# Altium PCB PCBkey.PcbDoc
Units mil, origin at the board's own origin, x right, y up, seen from the top; angles counter-clockwise.
Board outline 3925 x 2365 mil, 2 copper layers (Top Layer, Bottom Layer); 83 components, 73 nets, 311 pads, 107 vias.
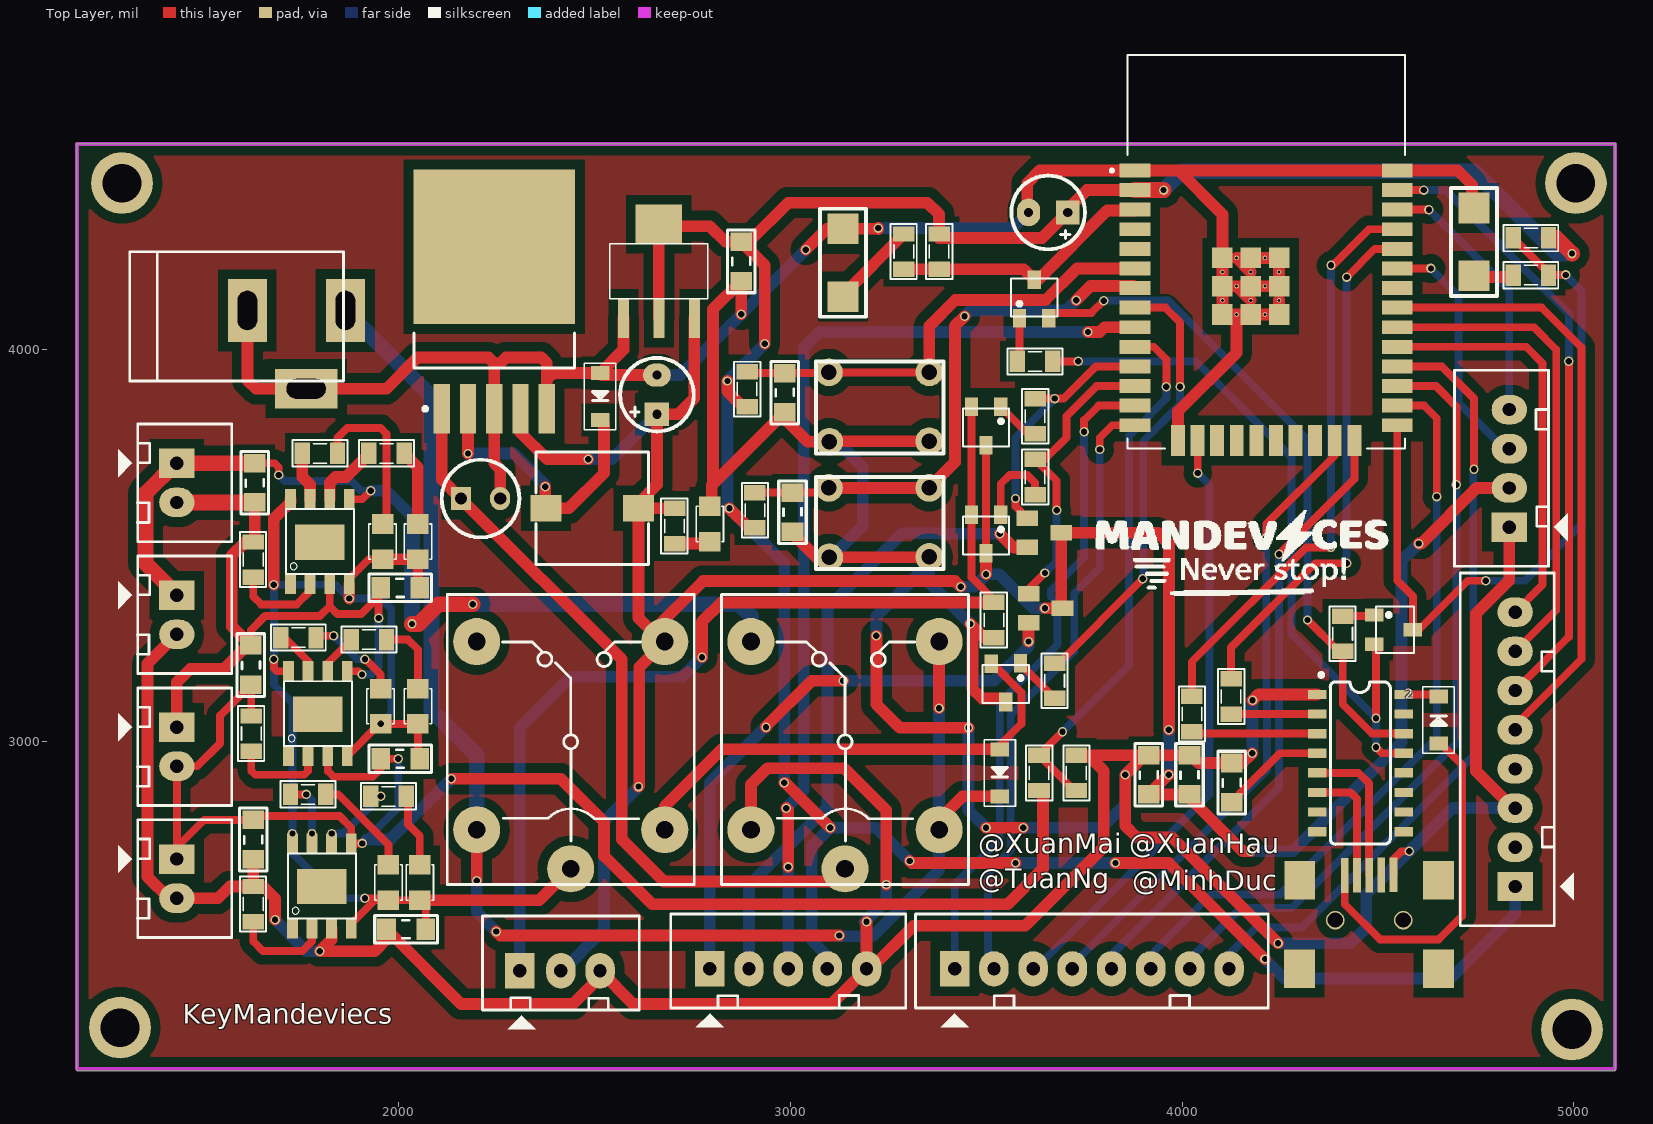
[diagram p0: Top Layer view]
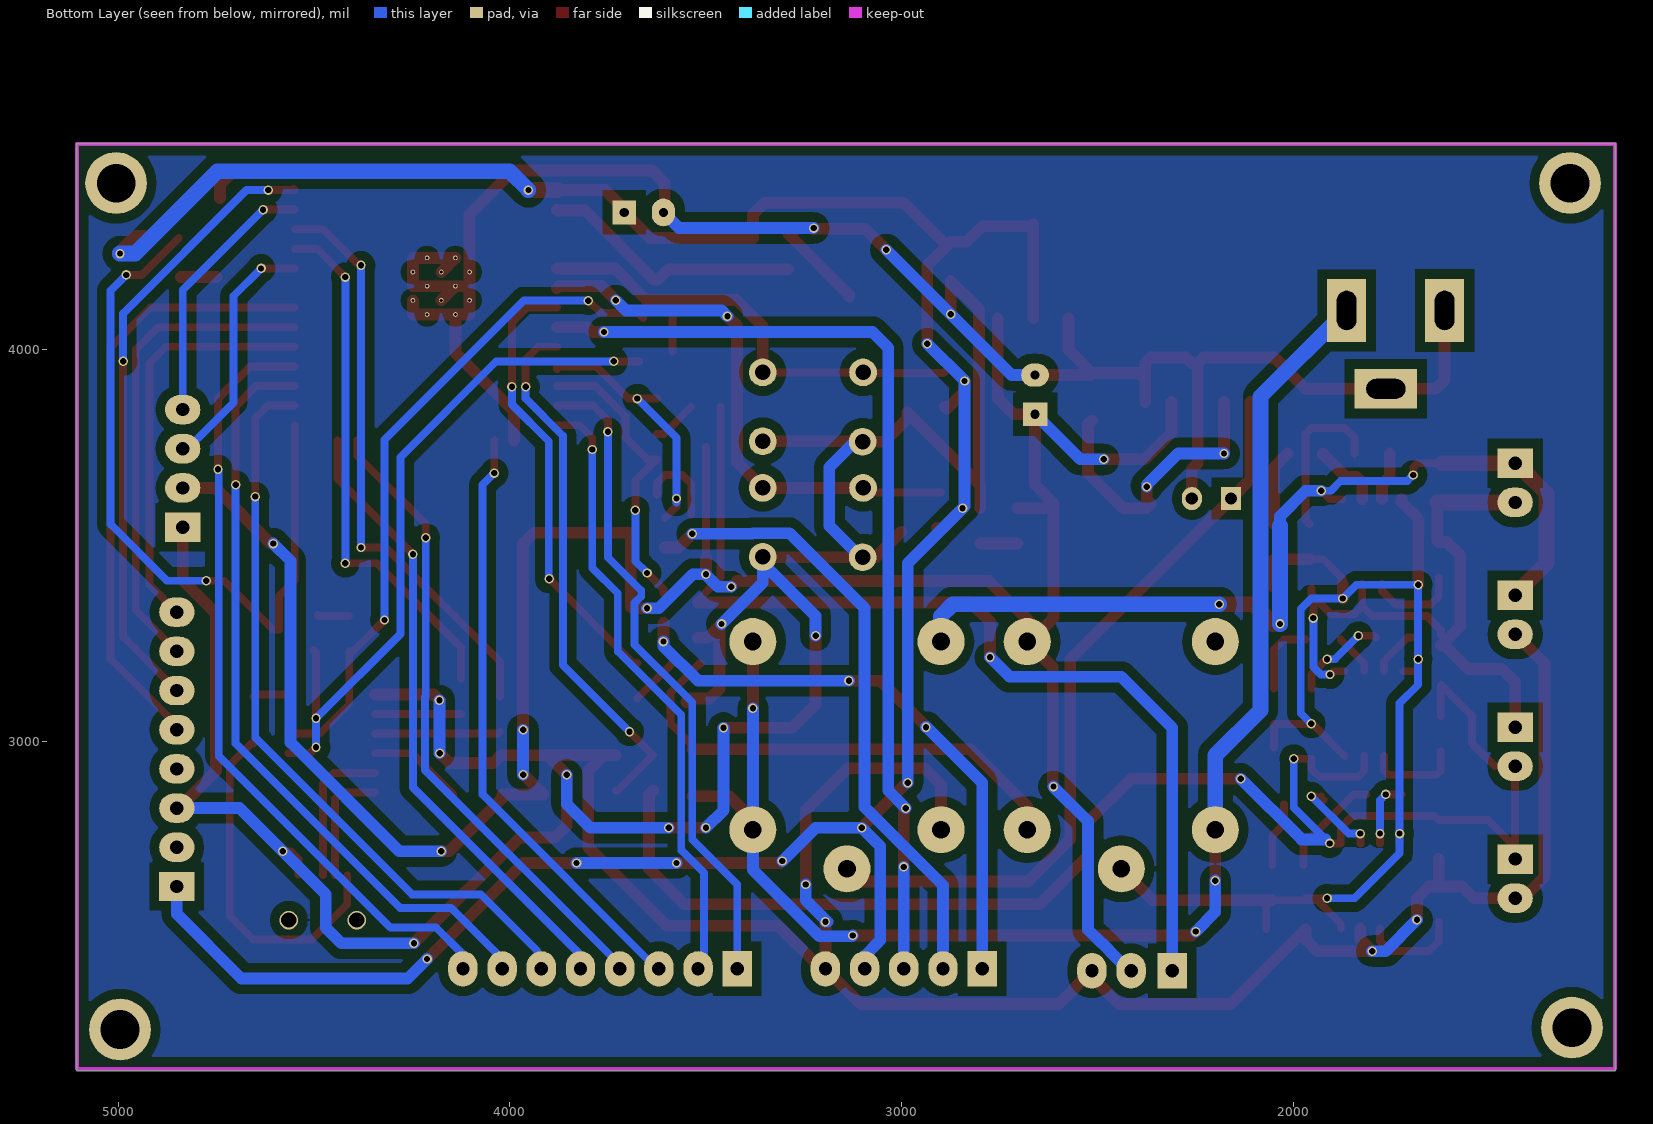
[diagram p1: Bottom Layer view, seen from below]
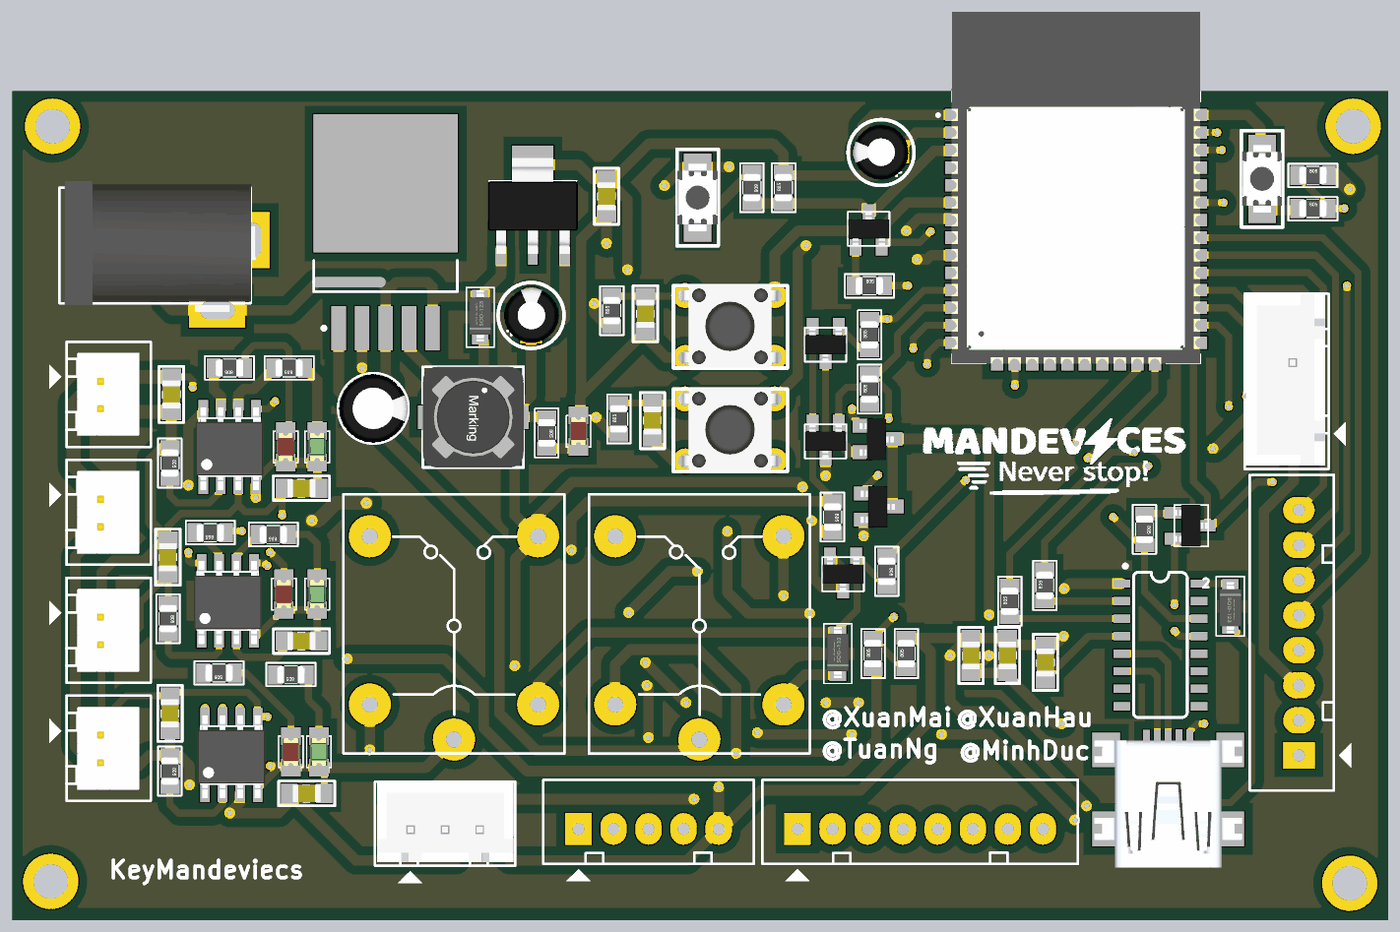
[diagram p2: 3D render of the assembled board from above, using the file's embedded part models]

## Layer stack, top to bottom
Top Solder: solder mask 0.4, Solder Resist, Dk 3.5
Top Layer: signal copper 1.4
Dielectric 1: dielectric 12.6, FR-4, Dk 4.8
Bottom Layer: signal copper 1.4
Bottom Solder: solder mask 0.4, Solder Resist, Dk 3.5

## Board outline
1180,2160 1180,4525 5105,4525 5105,2160

## Design rules (kind name [scope] priority, off if disabled: settings)
Clearance [All] p1: gap=25 ignorepadtopadclearanceinfootprint=FALSE except(0: Arc-Text Arc-Hole Track-Text Track-Hole SMDPad-Text SMDPad-Hole THPad-Text THPad-Hole Via-Text Via-Hole Fill-Text Fill-Hole Poly-Text Poly-Hole Region-Text Region-Hole Text-Text Text-Hole; 7: Arc-Arc Arc-Track Arc-SMDPad Track-Track Track-SMDPad SMDPad-SMDPad; 10: Arc-THPad Arc-Via Track-THPad Track-Via SMDPad-THPad SMDPad-Via THPad-THPad THPad-Via Via-Via)
PolygonConnect [All] p1: connectstyle=Relief reliefconductorwidth=10 reliefentries=4 polygonreliefangle="90 Angle" airgapwidth=10
RoutingVias [All] p1: holewidth=16 width=24 viastyle="Through Hole" minholewidth=16 minwidth=24 maxholewidth=16 maxwidth=24
SolderMaskExpansion [All] p1: expansion=4 istentingtop=FALSE
Width [All] p1: maxlimit=40 minlimit=20 preferedwidth=30
30 further rules are at their usual default settings.

## Classes and differential pairs
component class keyMANDevices: C1 C2 C3 C5 C6 C8 C9 C12 C17 DIO1 JP9 LED2 LED4 Q2 R2 R6 R7 R8 R9 R10 R12 R13 R17 R20 R27 R29 S1 S2 Servo SW1 U1 U2 U3 U4 U10 U13

## Components (designator, comment, footprint, x,y, rotation, side; value= is the part's Value field where it differs from the comment)
1N5824 "" DIO-SMD-123 2515,3880 r90 top value=1N5007
2 "" DIO-SMD-123 4654.5,3055 r270 top value=1N5007 (schematic designator DIO2)
C1 "" CAP_0805 2874,4225 r90 top value=33p
C2 "" C5mm 2210,3620 r0 top
C3 "" CAP_0805 2985,3890 r90 top value=33p
C4 "" C3MM 3658.39,4350 r180 top
C5 "" CAP_0805 3005,3585 r90 top value=33p
C6 "" CAP_0805 4128,2895.11 r270 top value=33p
C7 "" CAP_0805 4020,2915 r270 top value=33p
C8 "" CAP_0805 3916,2915 r270 top value=33p
C9 "" C3MM 2660,3885 r90 top
C11 "" CAP_0805 2005,3391 r180 top value=33p
C12 "" CAP_0805 1635,3660 r270 top value=33p
C14 "" CAP_0805 2005,2955 r180 top value=33p
C15 "" CAP_0805 1625,3195 r270 top value=33p
C17 "" CAP_0805 2020,2520 r180 top value=33p
C18 "" CAP_0805 1631,2750 r270 top value=33p
DIO1 "" DIO-SMD-123 3535,2920 r90 top value=1N5007
JDC1 "" DC-IN 1740,4000 r0 top value="Jac DC"
JP6 "" CON2 1435,3373.33 r270 top value="Connector 2"
JP7 "" CON2 1435,3710 r270 top value="Connector 2"
JP8 "" CON2 1435,3036.67 r270 top value="Connector 2"
JP9 "" CON2 1435,2700 r270 top value="Connector 2"
KeyPad "" CON8 3420,2420 r0 top value="Connector 8"
L1 "" L-SMD-M-7.3x4.5 2495,3595 r90 top
LCD_I2C "" CON4 4835,3547 r90 top value="Connector 4"
LED1 "" LED-0805-Red 2795,3510 r90 top value="LED 3 ly Single Colour"
LED2 "" LED-0805-Red 1960,3465 r90 top value="LED 3 ly Single Colour"
LED3 "" LED-0805-Green 2050,3465 r90 top value="LED 3 ly Single Colour"
LED4 "" LED-0805-Red 1955,3045 r90 top value="LED 3 ly Single Colour"
LED5 "" LED-0805-Green 2050,3045 r90 top value="LED 3 ly Single Colour"
LED6 "" LED-0805-Red 1975,2595 r90 top value="LED 3 ly Single Colour"
LED7 "" LED-0805-Green 2055,2595 r90 top value="LED 3 ly Single Colour"
motor "" CON5 2795,2420 r0 top value="Connector 5"
Q1 "" SOT23D 3623,4129 r0 top value=C1815
Q2 "" SOT23D 4539.33,3285 r270 top value=C1815
Q3 "" SOT23D 3500,3805 r180 top value=C1815
Q4 "" SOT23D 3500,3529.21 r180 top value=C1815
QB1 "" SOT23D 3550,3150 r180 top value=D718
R1 "" RES-SMD-0805 2890,3899 r90 top
R2 "" RES-SMD-0805 2705,3550 r270 top
R3 "" RES-SMD-0805 3380,4250 r90 top
R4 "" RES-SMD-0805 4890,4285 r0 top
R5 "" RES-SMD-0805 3290,4250 r270 top
R6 "" RES-SMD-0805 4890,4190 r0 top
R7 "" RES-SMD-0805 2910,3590 r90 top
R8 "" RES-SMD-0805 4125,3115 r90 top
R9 "" RES-SMD-0805 4025,3070 r90 top
R10 "" RES-SMD-0805 3625,3970 r0 top
R11 "" RES-SMD-0805 4410,3275 r270 top
R12 "" RES-SMD-0805 3635,2920 r90 top
R13 "" RES-SMD-0805 3730,2920 r90 top
R14 "" RES-SMD-0805 3625,3830 r90 top
R15 "" RES-SMD-0805 1800,3735 r180 top
R16 "" RES-SMD-0805 1970,3735 r180 top
R17 "" RES-SMD-0805 1630,3464 r270 top
R18 "" RES-SMD-0805 3675,3155 r270 top
R20 "" RES-SMD-0805 3625,3675 r90 top
R21 "" RES-SMD-0805 3520,3310 r270 top
R22 "" RES-SMD-0805 1745,3265 r180 top
R23 "" RES-SMD-0805 1925,3260 r180 top
R24 "" RES-SMD-0805 1625,3020 r270 top
R27 "" RES-SMD-0805 1770,2865 r180 top
R28 "" RES-SMD-0805 1975,2860 r180 top
R29 "" RES-SMD-0805 1630,2585 r270 top
RFID "" CON8 4850,2630 r90 top value="Connector 8"
RL1 "" RL_SPDT_10A 3140,2675 r90 top value="Relay SPDT, 10A, 12V"
RL2 "" RL_SPDT_10A 2440,2675 r90 top value="Relay SPDT, 10A, 12V"
S1 "" "SW 3x2x4" 3135,4221.61 r90 top
S2 "" "SW 3x2x4" 4745,4275 r90 top
Servo "" CON3 2315,2415 r0 top value="Connector 3"
SW1 "" SW-4P-S 3355,3766 r180 top
SW2 "" SW-4P-S 3355,3471 r180 top
T1 "" A3401 3648.31,3532.6 r270 top
T2 "" A3401 3651.69,3340 r270 top
U1 "" LM1117-SOP 2665,4130 r0 top
U2 "" MODULE_ESP32-WROOM-32 4214.65,4250 r0 top
U3 "" SO016 4455,2945 r270 top
U4 "" TO-263 2245,4085 r90 top
U7 "" TP4056 1800,3510 r90 top
U10 "" TP4056 1795,3071 r90 top
U13 "" TP4056 1805,2631 r90 top
USB1 "" USB_B_MINI_SMD 4415.33,2658 r180 top

## Footprints (in the part's own frame and the unit in brackets; to place one, negate y for a bottom-side part, rotate by r counter-clockwise, add the part's x,y. Pads: shape width x height; smd on the part's side, far side on the other; paste and mask are expansions set on the pad)
A3401 [mm] "P-Channel 30V 4A _Ta_ 1.4W _Ta_ Surface Mount SOT-23-3"
  rect 1x1.4 smd: 1(-0.95,-1.1) 2(0.95,-1.1) 3(0,1.1)
  body extent -1.47,-1.33 1.53,1.17, height 1.06
C3MM [mm]
  rect 1.5x1.58 hole 0.6: 1(-1.27,0)
  oval 1.5x1.8 hole 0.6: 2(1.27,0)
  silkscreen extent -2.39,-2.39 2.39,2.39, body extent -2,-2.03 1.99,1.97, height 7.01
C5mm [mm]
  rect 1.3x1.5 hole 0.8: 1(-1.27,0)
  oval 1.3x1.5 hole 0.8: 2(1.27,0)
  silkscreen extent -2.51,-2.51 2.51,2.51, body extent -2.5,-2.5 2.49,2.5, height 11.01
CAP_0805 [mm]
  rect 1.2x1.4 smd: 1(-1.27,-0.025) 2(1.27,-0.025)
  silkscreen extent -2.03,-0.91 2.03,0.86, body extent -1.01,-0.66 1.01,0.61, height 0.61
CON2 [mil] "CON2"
  rect 75x90 hole 34: 1(0,0)
  oval 75x90 hole 34: 2(100,0)
  silkscreen extent -100,-150 200,140, body extent -68,-70 168,107, height 236
CON3 [mil] "CON 3"
  rect 75x90 hole 34: 1(-5,0)
  oval 75x90 hole 34: 2(100,0) 3(200,0)
  silkscreen extent -100,-150 300,140, body extent -95,-90 295,136, height 276
CON4 [mil] "CON4"
  rect 75x90 hole 34: 1(0,0)
  oval 75x90 hole 34: 2(100,0) 3(200,0) 4(300,0)
  silkscreen extent -100,-150 400,140, body extent -90,-90 398,136, height 276
CON5 [mil] "CON5"
  rect 75x90 hole 34: 1(0,0)
  oval 75x90 hole 34: 2(100,0) 3(200,0) 4(300,0) 5(400,0)
  silkscreen extent -100,-150 500,140
CON8 [mil] "CON8"
  rect 75x90 hole 34: 1(0,0)
  oval 75x90 hole 34: 2(100,0) 3(200,0) 4(300,0) 5(400,0) 6(500,0) 7(600,0) 8(700,0)
  silkscreen extent -100,-150 800,140
DC-IN [mil] "Jac DC input"
  rect 100x160 hole 50 slot 100 at 90 deg: 1(125,100) 2(-125,100)
  rect 160x100 hole 50 slot 100 at 0 deg: 3(25,-100)
  silkscreen extent -425,-80 120,250, body extent -410,-105 134,269, height 434
DIO-SMD-123 [mm]
  rect 0.9x1.2 smd: 1(1.524,0) 2(-1.524,0)
  silkscreen extent -2.16,-1.02 2.16,1.02, body extent -1.76,-0.8 1.94,0.8, height 1.25
L-SMD-M-7.3x4.5 [mm] "WE-PDA SMD Shielded Power Inductor, 7345"
  rect 1.7x2 smd: 1(0,3) 2(0,-3)
  silkscreen extent -3.65,-3.65 3.65,3.65, body extent -3.65,-3.65 3.65,3.65, height 4.05
LED-0805-Green [mil]
  rect 50x55 smd: 1(0,0) 2(90,0)
  silkscreen extent 0,-35 90,35, body extent 5,-25 85,25, height 43
LED-0805-Red [mil]
  rect 50x55 smd: 1(0,0) 2(90,0)
  silkscreen extent 0,-35 90,35, body extent 5,-25 85,25, height 43
LM1117-SOP [mm]
  rect 0.7x2.54 smd: 1(-2.3,-1.27) 2(0,-1.27) 3(2.3,-1.27)
  rect 3x2.54 smd: 2(0,4.826)
  silkscreen extent -3.17,0 3.17,3.56, body extent -3.25,-1.78 3.25,5.18, height 1.68
MODULE_ESP32-WROOM-32 [mm]
  rect 2x0.9 smd: 1(-8.5,5.26) 2(-8.5,3.99) 3(-8.5,2.72) 4(-8.5,1.45) 5(-8.5,0.18) 6(-8.5,-1.09) 7(-8.5,-2.36) 8(-8.5,-3.63) 9(-8.5,-4.9) 10(-8.5,-6.17) 11(-8.5,-7.44) 12(-8.5,-8.71) 13(-8.5,-9.98) 14(-8.5,-11.25) 25(8.5,-11.25) 26(8.5,-9.98) 27(8.5,-8.71) 28(8.5,-7.44) 29(8.5,-6.17) 30(8.5,-4.9) 31(8.5,-3.63) 32(8.5,-2.36) 33(8.5,-1.09) 34(8.5,0.18) 35(8.5,1.45) 36(8.5,2.72) 37(8.5,3.99) 38(8.5,5.26)
  rect 0.9x2 smd: 15(-5.715,-12.25) 16(-4.445,-12.25) 17(-3.175,-12.25) 18(-1.905,-12.25) 19(-0.635,-12.25) 20(0.635,-12.25) 21(1.905,-12.25) 22(3.175,-12.25) 23(4.445,-12.25) 24(5.715,-12.25)
  rect 1.33x1.33 smd: 39_1(-2.835,-0.405) 39_2(-1,-0.405) 39_3(0.835,-0.405) 39_4(-2.835,-2.24) 39_5(-1,-2.24) 39_6(0.835,-2.24) 39_7(-2.835,-4.075) 39_8(-1,-4.075) 39_9(0.835,-4.075)
  round 0.3 hole 0.2: 39_10(-1.917,-0.405) 39_11(-0.082,-0.405) 39_12(-2.835,-1.322) 39_13(-1,-1.322) 39_14(0.835,-1.322) 39_15(-1.917,-2.24) 39_16(-0.082,-2.24) 39_17(-2.835,-3.157) 39_18(-1,-3.157) 39_19(0.835,-3.157) 39_20(-1.917,-4.075) 39_21(-0.082,-4.075)
  silkscreen extent -10.1,-12.75 9,12.75, body extent -9.02,-12.75 8.98,12.75, height 3.2
RES-SMD-0805 [mil]
  rect 39.37x55 smd: 1(-45,0) 2(45,0)
  silkscreen extent -70,-34 70,33, body extent -39,-25 39,25, height 31
RL_SPDT_10A [mil] "Relay SPDT, 5 pin, 10A,W 650mil, L 800mil, H 800mil"
  round 120 hole 45: 1(0,0) 2(580,240) 3(580,-240) 4(100,-240) 5(100,240)
  silkscreen extent -40,-315 700,315
SO016 [mm]
  rect 0.6x1.2 smd: 1(-4.445,-2.8) 2(-3.175,-2.8) 3(-1.905,-2.8) 4(-0.635,-2.8) 5(0.635,-2.8) 6(1.905,-2.8) 7(3.175,-2.8) 8(4.445,-2.8) 9(4.445,2.8) 10(3.175,2.8) 11(1.905,2.8) 12(0.635,2.8) 13(-0.635,2.8) 14(-1.905,2.8) 15(-3.175,2.8) 16(-4.445,2.8)
  silkscreen extent -5.84,-2.67 5.26,1.95
SOT23D [mm] "SOT 23C - 1-3-2 - BCE"
  rect 0.85x1.2 smd: 1(-0.95,-1.25) 2(0.94,-1.245) 3(0,1.25)
  silkscreen extent -1.5,-1.14 1.5,1.32, body extent -1.5,-1.17 1.5,1.33, height 1.06
"SW 3x2x4" [mm]
  rect 2x2 smd: 1(-2.2,0) 2(2.2,0)
  silkscreen extent -3.5,-1.5 3.5,1.5, body extent -2.45,-1.45 2.45,1.45, height 2
SW-4P-S [mm]
  round 1.8 hole 1: 1(0,0) 2(0,-4.47) 3(6.502,-4.47) 4(6.477,0.025)
  silkscreen extent -0.91,-5.18 7.34,0.79, body extent -0.86,-5.23 7.35,0.76, height 9.52
TO-263 [mm]
  rect 3.2x1.05 smd: 1(-6,3.4) 2(-6,1.7) 3(-6,0) 4(-6,-1.7) 5(-6,-3.4)
  rect 10x10.45 smd: 6(4.5,0)
  silkscreen extent -6.12,-5.2 -1.1,5.2, body extent -6.58,-5.2 7.57,5.2, height 4.65
TP4056 [mm]
  rect 1.3x0.7 smd: 1(-2.75,1.905) 2(-2.75,0.635) 3(-2.75,-0.635) 4(-2.75,-1.905) 5(2.75,-1.905) 6(2.75,-0.635) 7(2.75,0.635) 8(2.75,1.905)
  rect 2.3x3.2 smd: GND(-0.025,0)
  silkscreen extent -2.1,-2.2 2.1,2.2, body extent -3.13,-2.45 2.87,2.45, height 1.75
USB_B_MINI_SMD [mm]
  rect 2x2.5 smd: 0(-6.075,0.305) 0(-6.071,6.045) 0(2.925,0.305) 0(2.929,6.045)
  rect 0.5x2.25 smd: 1(0,0) 2(-0.787,-0.013) 3(-1.575,-0.025) 4(-2.362,-0.038) 5(-3.15,-0.051)
  body extent -6.92,-0.37 3.78,8.83, height 3.95

## Part data
1N5824 2 DIO1: library part "Diode SMD", "Default Diode", Code - JEDEC=DO-214-AB, Published=8-Jun-2000, Publisher="Altium Limited", Revision="July-2002: Re-released for DXP Platform."
C1 C3 C5 C6 C7 C8 C11 C12 C14 C15 C17 C18: library part CapSMD, "Capacitor", LatestRevisionDate=17-Jul-2002, LatestRevisionNote="Re-released for DXP Platform.", PackageReference=RAD-0.3, Published=8-Jun-2000, Publisher="Altium Limited"
C2 C4 C9: library part "Cap Pol", "Polarized Capacitor (Axial)", LatestRevisionDate=17-Jul-2002, LatestRevisionNote="Re-released for DXP Platform.", PackageReference=POLAR0.8, Published=8-Jun-2000, Publisher="Altium Limited"
JDC1: library part DCIN, "Jac DC input"
JP6 JP7 JP8 JP9: library part Con2, "Connector 2"
KeyPad RFID: library part Con8, "Connector 8"
L1: library part L-SMD-1, Inductance="1.0 µH", Manufacturer="Wurth Elektronik", partNo=78477010, ComponentLink1Description=Manufacturer, ComponentLink1URL=http://www.we-online.de, ComponentLink2Description=Datasheet, ComponentLink2URL=http://katalog.we-online.de/pbs/datasheet/78477010.pdf, Created by="Baojun Chen", Created Date=Nov.2015
LCD_I2C: library part Con4, "Connector 4"
LED1 LED2 LED3 LED4 LED5 LED6 LED7: library part LED, "LED Single colour Green and Red"
motor: library part Con5, "Connector 5"
Q1 Q2 Q3 Q4: library part 2N222, "NPN 600mW, ECB", =C2383
QB1: library part 2SC5200, "Transistor Power Supply"
R1 R2 R3 R4 R5 R6 R7 R8 R9 R10 R11 R12 R13 R14 R15 R16 R17 R18 R20 R21 R22 R23 R24 R27 R28 R29: library part "Resistor - SMD", "Resistor", Manufacturer="Generic Components", Class=Passive, Published=08/06/2000, Publisher="Altium Hobart Technology Centre"
RL1 RL2: library part "Relay 1", "Relay SPDT,10A - 12VDC 5 Pin", ="Relay SPDT, 10A, 24V"
S1 S2: library part SW-SMD, "Switch", LatestRevisionDate=17-Jul-2002, LatestRevisionNote="Re-released for DXP Platform.", PackageReference=SPST-2, Published=24-Mar-1999, Publisher="Altium Limited"
Servo: library part Con3, "Connector 3"
SW1 SW2: library part SW-4PIN-SMALL, "Switch Small 4 Pin", LatestRevisionDate=17-Jul-2002, LatestRevisionNote="Re-released for DXP Platform.", PackageReference=SPST-2, Published=24-Mar-1999, Publisher="Altium Limited"
T1 T2: library part A03401, "P-Channel 30V 4A _Ta_ 1.4W _Ta_ Surface Mount SOT-23-3"
U1: library part LM1117-ADJ, "800mA Low-Dropout Linear Regulator", Creator="Nguyen Ba Bien", Website=http://group3i.net
U2: library part ESP32-WROOM-32, "Bluetooth, WiFi Transceiver Module 2.4GHz ~ 2.5GHz Surface Mount", Package="Module Espressif Systems", Digi-Key_Part_Number=1904-1010-1-ND, Digi-Key_Purchase_URL=https://www.digikey.com/product-detail/en/espressif-systems/ESP32-WROOM-32/1904-1010-1-ND/8544305?utm_source=snapeda&utm_medium=aggregator&utm_campaign=symbol, MF="Espressif Systems", MP=ESP32-WROOM-32, SnapEDA_Link=https://www.snapeda.com/parts/ESP32-WROOM-32/Espressif%20Systems/view-part/2753322/?ref=snap
U3: library part CH340C, "USB to serial chip CH340", Package=Package, Availability=Unavailable, Check_prices=https://www.snapeda.com/parts/CH340C/WCH/view-part/5428851/?ref=eda, MF=WCH, MP=CH340C, Price=None, SnapEDA_Link=https://www.snapeda.com/parts/CH340C/WCH/view-part/5428851/?ref=snap
U4: library part LM2596, Max Input Voltage="12 V", Max Output Current="3 (6.0 peak) A", Max Output Voltage=mV, Temperature Range="-40 to +125 degC", Category=IC-Power, Min Input Voltage=mV, Min Output Voltage=mV, Mounting Technology="Surface Mount", Status=Unreleased, Supply Voltage=mV
U7 U10 U13: library part TP4056, "Complete single cell Li-Ion battery with a constant current / constant voltage linear charger"
USB1: library part USB_M

## Free pads (board coordinates)
  round 157.48 hole 98.43: 0(1295,4425) 0(4995,2265) 1(1290,2270) 2(5005,4425)

## Via types
v1: diameter 24, hole 16, Top Layer to Bottom Layer, 105 vias
v2: diameter 47.24, hole 39.37, Top Layer to Bottom Layer, 2 vias

## Nets (pads, with @x,y where several pads share a name; then routed paths per layer and width w, separated by ;. In a path a pad name is that pad's centre, name@x,y a point inside that pad or via, vN(x,y) a via of type N, cw(c..) or ccw(c..) an arc to the next point about the centre after c; other vN are vias at no path point)
AccessPoint: C5.2 R7.2 SW2.2 SW2.3 U2.7 | length 1404.5
  Top Layer w20: R7.2@2900,3635 C5.2 3087,3635 SW2.3
  Top Layer w30: SW2.3 SW2.2 3420.43,3712.43 3420.43,4060.43 v1(3445,4085) ; v1(3730,4125.69) 3766.31,4162 3875.44,4162 U2.7@3880.35,4157.09
  Bottom Layer w30: v1(3445,4085) 3460,4100 3704.31,4100 v1(3730,4125.69)
ADC2_CH8: R12.2 R13.1 U2.10 | length 1370.2
  Top Layer w20: v1(3695,3025) R12.2 3725,2875 R13.1 ; U2.10 3927.91,4007.09 3960,3975 v1(3960,3905)
  Bottom Layer w20: v1(3695,3025) 3865,3195 3865,3780 3960,3875 v1(3960,3905)
BOOT: Q2.3 R4.1 R6.2 U2.25 | length 1907.5
  Top Layer w20: U2.25 4549.29,3410.71 4589.21,3370.79 Q2.3@4589.21,3285 ; Q2.3 Q2.3@4589.21,3285 ; v1(4775,3410) 4729.21,3410 4604.21,3285 Q2.3@4589.21,3285 ; R4.1 4940,4190 4978.82,4190 v1(4979.41,4190.59)
  Bottom Layer w20: v1(4775,3410) 4875,3410 5019,3554 5019,4151 v1(4979.41,4190.59)
COL1: KeyPad.5 U2.24 | length 1609.4
  Top Layer w20: v1(4247.52,3477.87) 4439.65,3670 U2.24
  Bottom Layer w20: KeyPad.5@3820,2415 3820,2455 4247.52,2882.52 v1(4247.52,3477.87)
COL2: KeyPad.6 U2.26 | length 1923.8
  Top Layer w20: U2.26@4549.65,3857.09 4617.91,3857.09 4650,3825 v1(4650,3625)
  Bottom Layer w20: KeyPad.6 3930.52,2430.52 3930.52,2466.02 4074.5,2610 4250,2610 4650,3010 v1(4650,3625)
COL3: KeyPad.7 U2.27 | length 1969.7
  Top Layer w20: U2.27@4549.65,3907.09 4647.91,3907.09 4700,3855 v1(4700,3655)
  Bottom Layer w20: KeyPad.7@4020,2415 4020,2445 4150,2575 4280,2575 4700,2995 v1(4700,3655)
COL4: KeyPad.8 U2.28 | length 2016.6
  Top Layer w20: U2.28@4549.65,3957.09 4662.91,3957.09 4745,3875 v1(4745,3695)
  Bottom Layer w20: KeyPad.8@4120,2415 4120,2456.61 4188.39,2525 4305,2525 4743,2963 4743,3693 v1(4745,3695)
Control: C3.2 R1.2 SW1.2 SW1.3 U2.6 | length 1171.8
  Top Layer w20: R1.2 2894,3940 C3.2 3097,3940 SW1.3 SW1.2
  Top Layer w30: SW1.2 3355,4060 3421.57,4126.57 3651.57,4126.57 3732.09,4207.09 U2.6@3880.35,4207.09
control1: R14.2 T1.1 U2.11 | length 664.8
  Top Layer w20: v1(3575,3620) 3575,3600 T1.1 ; R14.2 v1(3675,3875) 3697.91,3875 3780,3957.09 U2.11 3880.35,3957.09 U2.11@3880.35,3950.5
  Bottom Layer w20: v1@3575,3610 v1(3575,3620) 3575,3775 v1(3675,3875)
control2: R20.2 T2.1 U2.12 | length 760.1
  Top Layer w20: T2.1 3608.39,3388.39 v1(3650,3430) ; v1(3680,3590) 3680,3665 R20.2 3650,3720 3705,3775 3705,3830 3782.09,3907.09 U2.12 U2.12@3880.35,3907.09
  Bottom Layer w20: v1(3650,3430) 3680,3460 v1(3680,3590)
DTR: Q2.2 R10.2 U3.13 | length 1793.2
  Top Layer w20: R10.2 v1(3735,3970) ; v1(4495,2985) 4510,2970 U3.13@4565,2970 ; v1(4495,3059) 4495,3227 Q2.2@4501,3233
  Bottom Layer w20: v1(3735,3970) 4035,3970 4279.52,3725.48 4279.52,3274.48 v1(4495,3059) v1(4495,2985)
EN: Q1.3 R3.1 R5.2 U2.3 | length 675.5
  Top Layer w30: R5.2 R3.1 3596.21,4205 Q1.3 3632.58,4178.21 3809.37,4355 3878.27,4355 U2.3@3880.35,4357.09
Encoder: motor.3 U2.9 | length 2472.3
  Top Layer w30: v1(2990,2830) 2995,2825 v1(2995,2680) ; v1(3760,4045) 3790,4045 3802.09,4057.09 U2.9
  Bottom Layer w30: v1(2990,2830) 3035,2875 3035,4005 3075,4045 v1(3760,4045) ; motor.3 v1(2995,2680)
GND: 1N5824.1 C1.1 C2.2 C3.1 C4.2 C5.1 C6.1 C7.1 C8.1 C9.2 C17.2 C18.2 JDC1.2 JDC1.3 JP6.2 JP9.2 LCD_I2C.1 LED1.2 motor.5 QB1.3 R13.2 R21.2 R29.1 RFID.3 RL1.5 S1.2 S2.2 Servo.3 SW1.1 SW1.4 SW2.1 SW2.4 U1.1 U2.1 U2.15 U2.38 U2.39_1 U2.39_2 U2.39_3 U2.39_4 U2.39_5 U2.39_6 U2.39_7 U2.39_8 U2.39_9 U2.39_10 U2.39_11 U2.39_12 U2.39_13 U2.39_14 U2.39_15 U2.39_16 U2.39_17 U2.39_18 U2.39_19 U2.39_20 U2.39_21 U3.1 U4.3 U4.5 U13.3 USB1.5 | length 18052.4
  Top Layer w20: USB1.5 4539.33,2699.33 4560,2720 v1(4580,2720)
  Top Layer w30: JP6.2 1360,3198.33 1360,2655 1415,2600 JP9.2 1540,2600 1570,2630 R29.1 ; JDC1.2 1615,3922.09 1637.09,3900 JDC1.3 1970,3900 2050,3980 2230,3980 2245,3965 ; C18.2 R29.1 ; v1(1685.59,2545) 1685.59,2599.41 1655,2630 R29.1 ; U13.3 1830,2495 v1(1800,2465) 1940,2465 1970,2495 C17.2 2161,2330 2445,2330 2515,2400 Servo.3 2600,2330 3105,2330 motor.5 ; C2.2 2260,3695 2245,3710 U4.3 2245,3965 ; U4.5@2378.86,3866.61 2378.86,3923.86 ; U1.1 2574.45,3999.45 1N5824.1 ; C9.2 2520,3935 1N5824.1 ; LED1.2@2800,3595 2800,3654 2803,3657 2803,4103 C1.1 v1(2875,4090) ; 2805,3659 C3.1 2986,3824 3045,3765 SW1.4 3101,3766 SW1.1 ; RL1.5 2900,2890 2942,2932 3138,2932 3245,2825 v1(3245,2635) ; C5.1@3001,3535 3066,3470 SW2.4 3354,3470 SW2.1 ; v1(3040,4255) 3093.23,4308.23 S1.2 3223.86,4308.23 3225,4307.09 v1(3225,4310) ; v1(3195,2540) 3195,2440 3185,2430 motor.5 ; v1(3220,3270) 3220,3095 3280,3035 v1(3455,3035) ; v1(3460,3300) v1@3465,3295 ; v1(3500,2780) v1(3595,2780) ; R21.2 3495,3265 v1@3465,3295 ; QB1.3 3540.79,3110 3490,3110 3465,3135 v1@3465,3295 ; C4.2 3605,4353.39 3605,4425 3637.09,4457.09 U2.1 3990.94,4457.09 ; R13.2 3760,2965 ; U2.15 3989.65,3842.56 4139.15,3992.07 U2.39_20 ; C6.1 4154,2945.11 v1(4179,2970.11) ; C6.1@4128,2945 4042.94,2945 4022.94,2965 C8.1 C8.1@3905,2965 ; v1(4180,3105) 4195,3120 U3.1@4344.53,3120 ; v1(4245,2485) 3975,2755 3885,2755 3855,2785 v1(3855,2915) C8.1@3905,2965 ; U2.39_19 U2.39_9 U2.39_21 U2.39_8 U2.39_20 ; S2.2@4740,4386.61 4740,4420 4702.91,4457.09 U2.38 3990.94,4457.09 ; LCD_I2C.1 4835,3410.89 4750,3325.89 4750,2925 4845,2830 RFID.3 ; 2245,3965 2260,3965 2275,3980 2365,3980 2378.86,3966.14 2378.86,3923.86 ; 2378.86,3923.86 2395,3940 1N5824.1 ; motor.5 3205,2420 3315,2530 3600,2530 3800,2730 3800,2925 3760,2965 ; 3760,2965 C8.1@3905,2965 ; 3990.94,4457.09 4103.03,4345 U2.39_1 U2.39_12 U2.39_4 ; U2.39_4 U2.39_17 U2.39_7 U2.39_20 ; U2.39_4 U2.39_15 ; U2.39_15 U2.39_18 ; U2.39_15 U2.39_5 U2.39_16 U2.39_6 U2.39_14 U2.39_3 U2.39_11 U2.39_2 U2.39_10 U2.39_13 ; U2.39_5@4157.21,4143.75 U2.39_18 ; U2.39_5@4157.21,4143.75 U2.39_18 ; U2.39_5@4157.21,4143.75 U2.39_18 ; U2.39_2@4157.21,4215.99 U2.39_13 ; U2.39_2@4157.21,4215.99 U2.39_13 ; U2.39_2@4157.21,4215.99 U2.39_13
  Bottom Layer w30: v1(1685.59,2545) 1765.59,2465 v1(1800,2465) ; C9.2 2720,3935 v1(2875,4090) v1(3040,4255) ; SW2.4 3105,3470 3185,3550 3185,3700 3120,3765 SW1.4 ; v1(3195,2540) 3190,2540 3245,2595 v1(3245,2635) ; v1(3220,3270) 3220,3320 SW2.1@3355,3455 ; v1(3225,4310) 3568.39,4310 C4.2 ; SW2.1 SW2.1@3355,3455 ; v1(3455,3035) 3455,2825 v1(3500,2780) ; v1(3460,3300) 3355,3405 SW2.1@3355,3455 ; v1(3595,2780) 3795,2780 3855,2840 v1(3855,2915) ; v1@4180,2970 v1(4180,3105) ; v1(4245,2485) 4430,2485 4470,2525 4470,2610 v1(4580,2720) 4690,2830 RFID.3
IRQ: RFID.4
Led3: LED7.2 R28.1 | length 167.4
  Top Layer w20: R28.1@2025,2840 2025,2789 2055,2759 LED7.2
MISO: RFID.5 U2.31 | length 1561
  Top Layer w20: U2.31@4549.65,4107.09 4917.91,4107.09 5019,4006 5019,3210.18 4851.91,3043.09 4850,3045 RFID.5
MOSI: RFID.6 U2.37 | length 1600
  Top Layer w20: U2.37@4552.2,4410 U2.37 v1(4617.09,4407.09) ; RFID.6 4850,3145 4865,3145 4987,3267 v1(4987,3970)
  Bottom Layer w20: v1(4617.09,4407.09) 4672.09,4407.09 4987,4092.17 v1(4987,3970)
motor1: motor.2 T1.2 | length 1607.1
  Top Layer w30: v1(3535,3530) 3569.8,3495.2 T1.2
  Bottom Layer w30: motor.2 2895,2632.67 3095,2832.67 3095,3340 3286.43,3531.43 3380.03,3531.43 3381.47,3530 v1(3535,3530)
motor2: motor.1 T2.2 | length 1492.9
  Top Layer w30: v1(2938.33,3036.67) 2938.33,3038.33 3055,3155 v1(3135,3155) ; v1(3608.39,3255) T2.2
  Bottom Layer w30: motor.1 2795,2895 2936.67,3036.67 v1(2938.33,3036.67) ; v1(3135,3155) 3520,3155 3608.39,3243.39 v1(3608.39,3255)
Net1N5824_2: 1N5824.2 L1.1 U4.2 | length 755.3
  Top Layer w30: v1(2178.07,3735) U4.2 U4.2@2178.07,3866.61 ; v1(2375,3650) 2375,3616.89 2365,3606.89 L1.1 2435,3595 2525,3685 2525,3810 1N5824.2
  Bottom Layer w30: v1(2178.07,3735) 2295,3735 2375,3655 v1(2375,3650)
NetC6_2: C6.2 U3.4 | length 243
  Top Layer w20: C6.2@4145,2865 4250,2970 U3.4@4344.53,2970
NetDIO1_1: DIO1.1 QB1.2 RL2.4 | length 1250.6
  Top Layer w20: QB1.2 3516.18,3199 3590,3125.18 3590,3045 3535,2990 DIO1.1
  Top Layer w30: RL2.4 2680,2835 2825,2980 DIO1.1
NetDIO2_1: 2.1 USB1.1 | length 903.3
  Top Layer w20: USB1.1 4415.33,2584.67 4505,2495 4655,2495 4715,2555 4715,2940 4660,2995 2.1
NetLED1_1: LED1.1 R2.2 | length 95
  Top Layer w30: R2.2 LED1.1@2800,3505
NetLED2_2: LED2.2 R15.1 | length 415.5
  Top Layer w20: R15.1 1845,3775 1870,3800 1955,3800 1969.69,3785.31 1969.69,3564.69 LED2.2
NetLED3_2: LED3.2 R16.1 | length 194.5
  Top Layer w30: R16.1 2050,3700 LED3.2
NetLED4_2: LED4.2 R22.1 | length 235.2
  Top Layer w20: R22.1 1795,3270 v1(1835,3270) ; v1@1921.5,3204.45 1955,3170.95 LED4.2
  Bottom Layer w20: v1(1835,3270) 1895,3210 v1(1915,3210)
NetLED5_2: LED5.2 R23.1 | length 190.4
  Top Layer w20: R23.1 2025,3260 2050,3235 LED5.2
NetLED6_2: LED6.2 R27.1 | length 264.7
  Top Layer w20: R27.1 1846.5,2865 1975,2736.5 LED6.2
NetQ1_1: Q1.1 R10.1 | length 84.9
  Top Layer w20: R10.1@3585.37,3995 3585.37,4079.56 Q1.1
NetQ2_1: Q2.1 R11.1 | length 81.1
  Top Layer w20: R11.1 4487.72,3320 Q2.1
NetQ3_1: Q3.1 R14.1 | length 116.3
  Top Layer w20: Q3.1 3606.62,3785 R14.1
NetQ4_1: Q4.1 R20.1 | length 214.2
  Top Layer w20: Q4.1 3537.4,3657.4 3560,3680 3605,3680 3625,3660 R20.1
NetQB1_1: QB1.1 R18.2 | length 125.5
  Top Layer w20: QB1.1 3587.4,3197.6 R18.2
NetR5_1: R5.1 S1.1 | length 247.3
  Top Layer w20: S1.1 S1.1@3140,4140 ; R5.1@3273.96,4295 R5.1
  Top Layer w30: S1.1 3135,4140 R5.1
NetR6_1: R6.1 S2.1 | length 91.6
  Top Layer w30: S2.1@4748.39,4185 R6.1@4840,4185
NetR8_1: R8.1 U3.2 | length 219.5
  Top Layer w20: R8.1 U3.2@4344.53,3070
NetR9_1: R9.1 U3.3 | length 321.6
  Top Layer w20: R9.1 4030,3020 U3.3@4344.53,3020
NetR15_2: R15.2 U7.7 | length 125
  Top Layer w30: R15.2 1755,3675 1775,3655 U7.7
NetR16_2: R16.2 U7.6 | length 174.3
  Top Layer w30: U7.6 1825,3660 1840,3675 1867.54,3675 1925,3732.46 R16.2
NetR17_2: R17.2 U7.2 | length 234.1
  Top Layer w20: R17.2 1630,3370 1650,3350 1740.92,3350 1775,3384.08 U7.2
NetR22_2: R22.2 U10.7 | length 120.6
  Top Layer w20: R22.2 1710,3265 1770,3205 U10.7
NetR23_2: R23.2 U10.6 | length 105.6
  Top Layer w20: U10.6 1820,3200 R23.2
NetR24_2: R24.2 U10.2 | length 241
  Top Layer w20: R24.2 1625,2925 1635,2915 1760,2915 1770,2925 U10.2
NetR27_2: R27.2 U13.7 | length 171.9
  Top Layer w20: R27.2 v1(1765,2865) ; U13.7 v1(1780,2765)
  Bottom Layer w20: v1(1765,2865) 1780,2850 v1(1780,2765)
NetR28_2: R28.2 U13.6 | length 239.3
  Top Layer w20: U13.6 U13.6@1830,2760 ; R28.2@1924.34,2850.67 R28.2@1930,2845 ; R28.2 R28.2@1930,2845 ; v1(1955,2860) 1945,2860 R28.2@1930,2845
  Bottom Layer w20: v1(1830,2765) 1860,2765 v1(1955,2860)
NetR29_2: R29.2 U13.2 | length 253.3
  Top Layer w20: R29.2 1630,2490 1655,2465 1754.75,2465 1780,2490.25 U13.2
OUT+: C12.1 JP6.1 JP7.1 RL1.2 U7.5 | length 2362.2
  Top Layer w20: C12.1 1685,3710 1695,3700 v1(1695,3680) ; U7.5 1908.27,3618.27 v1(1930,3640)
  Top Layer w40: JP6.1 1435,3375 1355,3455 1355,3632.96 1432.04,3710 JP7.1 C12.1@1621.73,3710 ; v1(2035,3300) 2052.36,3300 2102.36,3350 v1(2190,3350)
  Bottom Layer w20: v1(1695,3680) 1710,3665 1880,3665 1905,3640 v1(1930,3640)
  Bottom Layer w30: v1(1930,3640) 1970,3640 2035,3575 2035,3550
  Bottom Layer w40: v1(2035,3300) 2035,3550 ; v1(2190,3350) 2870,3350 2900,3320 RL1.2
pin: R18.1 U2.8 | length 1138.1
  Top Layer w20: R18.1 3685,3200 v1(3900,3415) ; U2.8 3957.48,4107.09 3995,4069.57 v1(3995,3905)
  Bottom Layer w20: v1@3901,3415 3901,3766 3995,3860 v1(3995,3905)
ROW1: KeyPad.1 U2.13 | length 1701.1
  Top Layer w20: v1(3750.09,3790.09) 3750.09,3820.09 3787.09,3857.09 U2.13
  Bottom Layer w20: KeyPad.1@3420,2415 3420,2635 3535,2750 3535,3100 3682,3247 3682,3353.25 3665,3370.25 3665,3385 3750.09,3470.09 v1(3750.09,3790.09)
ROW2: KeyPad.2 U2.14 | length 1587.7
  Top Layer w20: v1(3790,3745) 3790,3775 3822.09,3807.09 U2.14
  Bottom Layer w20: KeyPad.2@3520,2415 3505,2430 3505,2665.25 3561.75,2722 3562,2722 3563,2723 3563,3068 3725,3230 3725,3377.91 3790,3442.91 v1(3790,3745)
ROW3: KeyPad.3 U2.16 | length 1551.7
  Top Layer w20: U2.16 4040,3767.36 v1(4040,3685)
  Bottom Layer w20: KeyPad.3@3620,2415 4070,2865 4070,3655 v1(4040,3685)
ROW4: KeyPad.4 U2.23 | length 1631.7
  Top Layer w20: v1(4215,3520) 4215,3554.83 4389.65,3729.48 U2.23
  Bottom Layer w20: KeyPad.4@3720,2415 3720,2430 4217,2927 4217,3113.25 4215,3115.25 v1(4215,3520)
RST: RFID.2
RTS: Q1.2 R11.2 U3.14 | length 1720.8
  Top Layer w20: Q1.2 3673.69,4093.69 3768.69,4093.69 v1(3800,4125) ; v1(4320,3310) 4400,3230 R11.2 4410,3095 4485,3020 U3.14@4565,3020
  Bottom Layer w20: v1@3809.37,4125.69 3964.31,4125.69 4320,3770 v1(4320,3310)
RX0: R8.2 U2.34 | length 1353.2
  Top Layer w20: R8.2 4125,3240 4340,3455 v1(4420,3455) ; v1(4420,4185) 4492.09,4257.09 U2.34
  Bottom Layer w20: v1(4420,3455) v1(4420,4185)
SCK: RFID.7 U2.30 | length 1259.4
  Top Layer w20: U2.30@4549.65,4057.09 4897.91,4057.09 4955,4000 4955,3335 RFID.7 RFID.7@4850,3246.91
SCL_I2C: LCD_I2C.4 U2.36 | length 677.8
  Top Layer w20: U2.36 v1(4630,4357.09) v1@4630,4355
  Bottom Layer w20: v1(4630,4357.09) 4835,4152.09 LCD_I2C.4
SDA_I2C: LCD_I2C.3 U2.33 | length 635.7
  Top Layer w20: U2.33 v1(4635,4207.09)
  Bottom Layer w20: v1(4635,4207.09) 4705,4137.09 4705,3865 4823,3747 LCD_I2C.3
servo: Q3.2 Q4.2 R21.1 Servo.1 | length 2536
  Top Layer w20: Q3.2 Q4.2 3463,3418.49 R21.1@3523.25,3358.25
  Top Layer w30: v1(2775,3215) 2775,3305 2825,3355 R21.1
  Bottom Layer w30: Servo.1 2310,3035 2440,3165 2725,3165 v1(2775,3215)
Source: C2.1 RL1.1 U4.1 | length 1934.3
  Top Layer w30: U4.1@2111.14,3866.61 U4.1 2111.14,3668.86 C2.1 2570,3210 2570,2750 2677,2643 3108,2643 RL1.1
SS: RFID.8 U2.29 | length 1051.8
  Top Layer w20: U2.29@4549.65,4007.09 4877.91,4007.09 4920,3965 4920,3400 RFID.8
TX0: R9.2 U2.35 | length 1491.5
  Top Layer w20: R9.2 4025,3203.23 4316.77,3495 v1(4380,3495) ; v1(4380,4215) 4385,4215 4477.09,4307.09 U2.35
  Bottom Layer w20: v1(4380,3495) v1(4380,4215)
UD+: U3.5 USB1.3 | length 377.8
  Top Layer w20: U3.5@4344.53,2920 4450,2920 4477.33,2892.67 USB1.3
UD-: U3.6 USB1.2 | length 303.7
  Top Layer w20: U3.6@4344.53,2870 4430,2870 4446.33,2853.67 USB1.2
VBat1-: C11.2 C12.2 C15.1 JP7.2 JP8.1 R17.1 U7.3 U10.5 | length 1704.7
  Top Layer w20: 1624,3271 1624,3284 1660,3320 1800,3320 1825,3345 ; U7.3 1825,3345 ; U10.5 1899.12,3179.27 v1(1907.39,3171) ; v1(1950,3315) C11.2@1950,3370.15 ; C11.2@1955,3390 1955,3375.15 C11.2@1950,3370.15 ; 1825,3345 1845,3325 1904.85,3325 C11.2@1950,3370.15
  Top Layer w30: JP8.1 1435,3151 1469,3185 1555,3185 1615,3245 C15.1 1575,3294 1575,3475 1609,3509 R17.1 1634,3513 C12.2
  Top Layer w40: JP7.2 C12.2
  Bottom Layer w20: v1(1907.39,3171) 1931,3171 1950,3190 v1(1950,3315)
VBat2-: C14.2 C15.2 C18.1 JP8.2 JP9.1 R12.1 R24.1 U10.3 U13.5 | length 3907.7
  Top Layer w20: JP9.1 JP9.1@1435,2730 ; R24.1 1625,3144 C15.2 1545,3066 1545,2995 1486.67,2936.67 JP8.2 JP9.1@1435,2730 ; U10.3 1820,2925 1835,2910 1935,2910 1955,2930 C14.2 v1(2000,2956) ; v1(1908.27,2740) 1880.73,2740 U13.5 1880,2780 1850,2810 1640,2810 C18.1 1505,2800 JP9.1@1435,2730
  Top Layer w30: v1(2135,2905) 2415,2905 2525,2795 2525,2708.11 2648.11,2585 3555,2585 3645,2675 3645,2865 R12.1
  Bottom Layer w20: 1918.27,2750 2000,2831.73 v1(2000,2956)
  Bottom Layer w30: 1918.27,2750 1980,2750 v1(2135,2905)
VccUSB: 2.2 U3.16 | length 91.6
  Top Layer w20: U3.16@4565,3120 4649.5,3120 2.2
Vcharge: C11.1 C14.1 C17.1 LED2.1 LED3.1 LED4.1 LED5.1 LED6.1 LED7.1 RL2.1 U7.4 U7.8 U10.4 U10.8 U13.4 U13.8 | length 3254.5
  Top Layer w20: v1(1682.5,3210) 1682.5,3186.77 1690,3179.27 U10.8 ; U13.8 U13.8@1730,2760 ; U10.4 1952.27,3045 v1(1955,3045) LED5.1 2050,2985 ; U7.4 1875,3415 1925,3465 LED2.1 ; U13.4 1880,2535 1940,2595 LED6.1 ; v1(1915,2600) 1970,2600 LED6.1 ; C11.1@2050,3397 C11.1 ; C17.1 2070,2580 LED7.1 LED6.1
  Top Layer w25: C11.1@2050,3397 LED3.1
  Top Layer w30: v1(1682.5,3400) 1682.5,3567.9 1725,3610.4 U7.8 ; v1(1875,3365) U7.4 ; LED2.1 LED3.1 ; LED7.1 2360,2595 RL2.1
  Bottom Layer w20: v1(1915,2600) 1845,2600 1730,2715 v1(1730,2765) 1730,3097.5 1682.5,3145 v1(1682.5,3210) v1(1682.5,3400) 1840,3400 v1(1875,3365) 1955,3365 1982,3338 1982,3072 v1(1955,3045)
VDD3V3: C1.2 C4.1 motor.4 R1.1 R3.2 R4.2 R7.1 RFID.1 U1.2 U2.2 | length 7229.7
  Top Layer w20: U1.2@2665,4320 U1.2@2670,4315 ; C1.2 C1.2@2895,4275 ; R3.2@3380,4285 R3.2
  Top Layer w30: U1.2@2665,4080 U1.2@2665,4320 ; U1.2@2670,4315 2795,4315 2835,4275 C1.2 2885,4265 2935,4215 v1(2935,4015) ; v1(2840,3920) 2840,3893.56 2884.78,3848.78 R1.1 ; v1(2845,3595) 2895,3545 R7.1 ; C1.2@2895,4275 2995,4375 3350,4375 3380,4345 R3.2 ; v1(2985,2895) 2987.33,2895 v1(3102.33,2780) ; v1(3305,2695) 3310,2690 v1(3575,2690) ; R3.2@3380,4285 3643.39,4285 C4.1 3708.39,4358.39 3757.09,4407.09 U2.2 ; v1(3830,2690) 3966.4,2690 v1(4211.4,2445)
  Top Layer w40: U2.2 v1(3952.91,4407.09) ; R4.2 4955,4285 v1(4995,4245)
  Bottom Layer w30: v1(2935,4015) v1(2840,3920) 2840,3600 v1(2845,3595) 2985,3455 v1(2985,2895) ; 3055,2492.67 3055,2732.67 v1(3102.33,2780) 3220,2780 v1(3305,2695) ; 3058.84,2488.84 3095,2452.67 motor.4 ; v1(3575,2690) v1(3830,2690) ; v1(4211.4,2445) 4261.4,2395 4685,2395 4850,2560 RFID.1
  Bottom Layer w40: v1(3952.91,4407.09) 4000.83,4455 4746.22,4455 4956.22,4245 v1(4995,4245)
VDD5V: C7.2 C8.2 C9.1 L1.2 LCD_I2C.2 Q3.3 Q4.3 R2.1 RL2.3 Servo.2 T1.3 T2.3 U1.3 U4.4 | length 6736.2
  Top Layer w20: Q4.3@3500,3470 Q4.3 Q3.3@3500,3751.79
  Top Layer w30: U4.4@2311.93,3866.61 U4.4 2311.93,3788.07 2380,3720 v1(2485,3720) ; v1(2613.11,2885) 2615,2886.89 2615,3190 RL2.3 RL2.3@2680,3280 ; R2.1 L1.2 ; U1.3 2755.55,3875.55 2715,3835 C9.1 2660,3655 2613.11,3608.11 L1.2 ; v1(3435,3395) 3420.43,3409.57 2777.68,3409.57 2648.11,3280 2613.11,3315 L1.2 ; v1(3500,3426.75) Q4.3@3500,3470 ; v1(3650,3340) 3688.23,3340 3691.61,3343.39 T1.3 3938.8,3532.6 3966.4,3505 v1(3966.4,3030) ; v1(3966.4,2915) 3965,2915 C8.2 C7.2 4019,2856 4155,2720 v1(4175,2720) ; v1(4604.21,3505) 4610,3505 4752,3647 LCD_I2C.2
  Bottom Layer w30: Servo.2 2420,2415 2452.5,2447.5 2452.5,2448.39 2489.11,2485 2490,2485 2525,2520 2525,2796.89 v1(2613.11,2885) ; v1(2485,3720) 2545,3720 C9.1 ; v1(3435,3395) 3470,3395 3500,3425 v1(3500,3426.75) 3533.25,3426.75 3620,3340 v1(3650,3340) ; v1(3966.4,2915) v1(3966.4,3030) ; v1(4175,2720) 4282.33,2720 4560,2997.67 4560,3460.79 v1(4604.21,3505)
VIN: DIO1.2 JDC1.1 RL1.3 RL1.4 RL2.5 | length 3736.9
  Top Layer w30: v1(2200,2645) RL2.5 ; v1(2250,2515) 2260,2505 v1(3125,2505) ; RL1.4 3380,2800 3440,2860 DIO1.2 ; v1(3380,3085) RL1.3
  Bottom Layer w30: v1(2200,2645) 2200,2565 v1(2250,2515) ; v1(3125,2505) 3127,2503 3210.33,2503 3380,2672.67 RL1.4 v1(3380,3085)
  Bottom Layer w40: JDC1.1 2085,3880 2085,3080 2200,2965 RL2.5
pads on no net: RL2.2 U2.4 U2.5 U2.17 U2.18 U2.19 U2.20 U2.21 U2.22 U2.32 U3.7 U3.8 U3.9 U3.10 U3.11 U3.12 U3.15 U4.6 U7.1 U7.GND U10.1 U10.GND U13.1 U13.GND USB1.0 USB1.4
copper on no net:
  other v2: 4390.72,2544.43 4563.94,2544.43

## Polygon pours and split planes (outlines as drawn)
no net on Top Layer "GND_BOTTOM" (solid, pour order 8): 1180,4525 1180,2165 5105,2165 5105,4525 1180,4525
no net on Bottom Layer "GND_BOTTOM" (solid, pour order 6): 1180,4525 1180,2165 5105,2165 5105,4525 1180,4525

## Keep-outs
Keep-Out Layer:
  lines w10: 1180,2165 1180,4350 1180,4500 1180,4525 5105,4525 5105,2675 5105,2165 1180,2165

## Silkscreen, mask and mechanical layers (free items; w line width, h text height)
Top Overlay:
  drawing of 907 lines, arcs and shapes, not listed
  text "@XuanMai" at 3480,2715 h50
  text "@XuanHau" at 3865.25,2715 h50
  text "@TuanNg" at 3480,2625 h50
  text "@MinhDuc" at 3873.44,2620 h50
  text "KeyMandeviecs" at 1450,2280 h50